# Altium PCB Micromouse_PCB.PcbDoc (part 3 of 3)
Units mm, origin at the board's own origin, x right, y up, seen from the top; angles counter-clockwise.
Board outline 75.15 x 115 mm, 2 copper layers (Top Layer, Bottom Layer); 124 components, 112 nets, 418 pads, 146 vias.
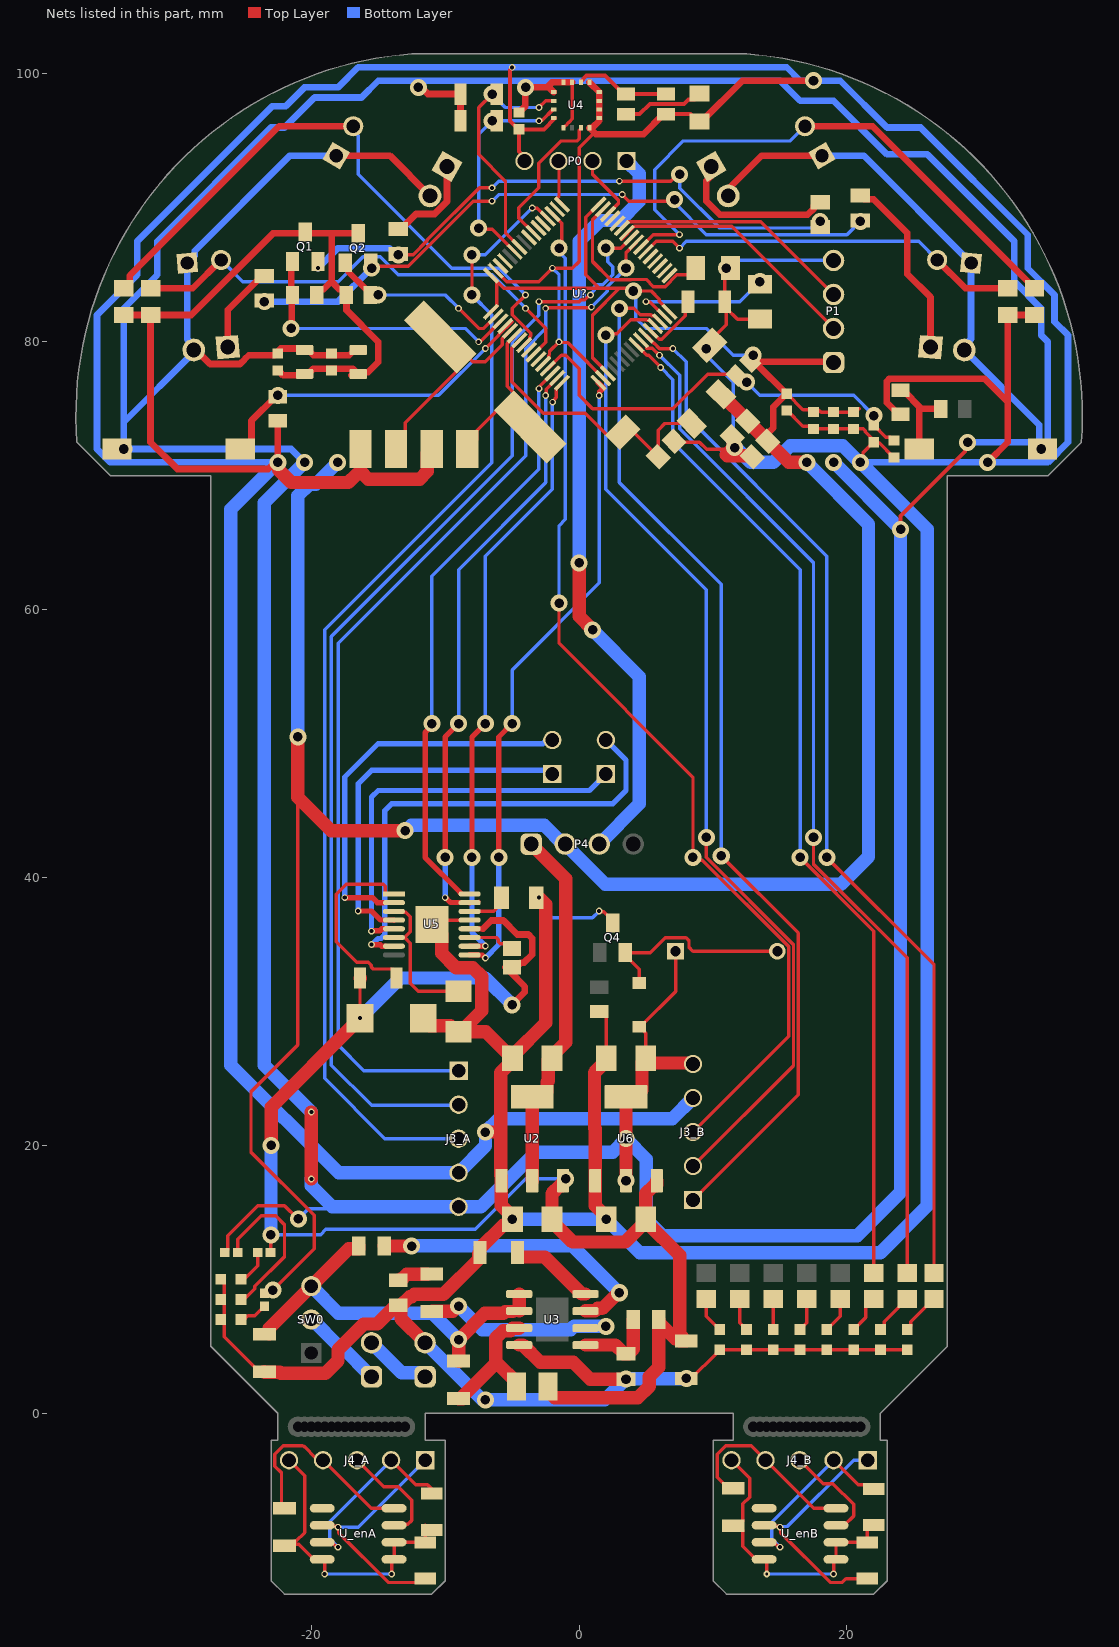
[diagram p2: the nets of this part, all layers, seen from the top]

## Via types
v1: diameter 1.27/1.27 (per signal layer), hole 0.711, Top Layer to Bottom Layer, 88 vias
v2: diameter 0.5, hole 0.3, Top Layer to Bottom Layer, 54 vias
v3: diameter 1.27, hole 0.711, Top Layer to Bottom Layer, 2 vias
v4: diameter 0.5, hole 0.2, Top Layer to Bottom Layer, 1 vias
v5: diameter 1, hole 0.3, Top Layer to Bottom Layer, 1 vias

## Nets (pads, with @x,y where several pads share a name; then routed paths per layer and width w, separated by ;. In a path a pad name is that pad's centre, name@x,y a point inside that pad or via, vN(x,y) a via of type N, cw(c..) or ccw(c..) an arc to the next point about the centre after c; other vN are vias at no path point) (continued)
DBL_6: DBL_6.2 U?.25 | length 76.7
  Top Layer w0.254: U?.25@4.268,79.768 4.286,79.768 5.066,78.988 5.187,78.988 v2(6.087,78.087) ; v1(16.5,41.5) 22,36 DBL_6.2@22,10.475
  Bottom Layer w0.254: v2(6.087,78.087) 7,77.175 7,72.5 16.5,63 v1(16.5,41.5)
DBL_7: DBL_7.2 U?.26 | length 77.4
  Top Layer w0.254: U?.26@5.027,79.527 5.473,79.527 v2(6,79) ; v1(17.5,43) 17.5,41.001 24.5,34.001 DBL_7.2@24.5,10.475
  Bottom Layer w0.254: v2(6,79) 7.5,77.5 7.5,73.5 17.5,63.5 v1(17.5,43)
DBL_8: DBL_8.2 U?.27 | length 79.5
  Top Layer w0.254: U?.27@4.975,80.475 4.993,80.475 5.587,79.881 5.619,79.881 6.001,79.5 v2(7,79.5) ; v1(18.5,41.5) 26.5,33.5 DBL_8.2@26.5,10.475
  Bottom Layer w0.254: v2(7,79.5) 8,78.5 8,74.5 18.5,64 v1(18.5,41.5)
DEBUG: R_BT.2 SW_BT1.1 U?.4 | length 25.1
  Top Layer w0.254: v2(-7,79.5) -5.996,80.504 -5.996,80.516 U?.4@-4.995,81.518
  Top Layer w0.5: SW_BT1.1@-25.31,72 -25.01,72 -24.46,72.55 -24.46,74.115 -22.675,75.9 R_BT.2@-22.5,75.9
  Bottom Layer w0.254: v1(-22.5,76) -10.5,76 v2(-7,79.5)
F_EM: Q2.1 R_IR2.2 U?.2 | length 13.4
  Top Layer w0.254: v2(-9,82.5) -7.5,81 -7.115,81 U?.2@-6.226,81.889
  Top Layer w0.5: Q2.1@-17.45,85.9 -17.2,85.65 -17.2,85.2 -15.925,83.925 -15.85,83.925 -15.6,83.675 R_IR2.2@-15.6,83.5
  Bottom Layer w0.254: v1(-15,83.5) -10,83.5 v2(-9,82.5)
GND: C1.2 C2.2 C3.1 C4.2 C5.2 C6.2 C7.2 C8.2 C9.2 C10.2 C11.1 C12.2 C13.2 C16.2 C17.2 C18.2 C19.1 C21.2 C22.2 C23.2 C24.2 C27.1 C_GYRO_1.2 C_GYRO_2.2 C_IR1.2 C_IR2.1 C_IR3.1 C_IR4.2 D1.1 D3.1 D5.1 D6.1 D7.1 D8.1 D9.1 D10.1 D11.1 D12.1 D13.1 J3_A.04 J3_B.04 P0.04 P1.4 P2.2 Q1.3 Q2.3 Q4.3 R5.1 R7.1 R9.2 R12.2 R_BT0_2.1 R_BT.1 R_BUZZ.1 R_GYRO_1.2 R_IR1.1 R_IR2.1 R_IR7.1 R_IR8.1 R_IR9.1 R_IR10.1 SW1_RST.2 U2.1 U3.4 U4.4 U4.8 U4.9 U4.10 U4.11 U4.12 U4.13 U5.13 U5.17 U6.1 U?.12 U?.18 U?.63 | length 702.5
  Top Layer w0.254: D3.1@-26.5,10 -26.5,5.725 -23.875,3.1 C12.2@-23.5,3.1 ; U5.17@-11,36.5 -10.675,36.825 U5.13@-8.175,36.825 ; U?.63@-6.226,85.311 -5.414,84.5 -3,84.5 v2(-2,85.5) -0.5,85.5 0,86 0,94.5 1.125,95.625 ; U?.12@-2.69,78.354 -2.269,78.774 -2.269,78.962 -2.212,79.019 -2.212,79.288 v2(-1.5,80) -1.455,79.955 -0.869,79.955 U?.18@2.214,76.872 ; R_BUZZ.1@1.5,30 1.651,30 2.024,29.627 C24.2@2.024,26.5 ; v2(1.5,37.5) 1.547,37.453 1.847,37.453 2.5,36.8 Q4.3@2.5,36.6 ; C3.1@7.084,72.584 7.155,72.513 8.987,72.513 9.516,71.984 11.484,71.984 v3(11.61,72.11) ; v1(8,2.6) 8.375,2.6 10.227,4.452 10.227,4.477 D5.1@10.5,4.75 D6.1@12.5,4.75 D7.1@14.5,4.75 D8.1@16.5,4.75 D9.1@18.5,4.75 D10.1@20.5,4.75 D11.1@22.5,4.75 D12.1@24.5,4.75 ; SW1_RST.2@9.749,80.022 11,81.273 R9.2@11,82.524 ; C27.1@11.3,85.5 10.876,85.076 R9.2@10.876,83 10.876,82.648 R9.2@11,82.524 ; C11.1@13.5,81.7 11.824,81.7 R9.2@11,82.524 ; C6.2@15.5,74.873 15.527,74.873 16.713,73.687 17.313,73.687 C7.2@17.5,73.5 C8.2@19,73.5 C9.2@20.5,73.5 21.218,73.5 21.367,73.351 21.367,73.281 22.195,72.453 22.393,72.453 23.473,71.373 C10.2@23.5,71.373 ; v1(21,71) 21.194,71.194 21.194,71.721 21.973,72.5 C22.2@22,72.5
  Top Layer w0.3: v2(-5,100.5) -5,100.446 -5.156,100.29 -5.156,96.502 -4.527,95.873 C_GYRO_1.2@-4.5,95.873 ; P0.04@-4.08,93.5 -4.08,93.79 -4.5,94.21 C_GYRO_1.2@-4.5,95.873 ; U4.4@-1.8,96.7 -2.627,95.873 C_GYRO_1.2@-4.5,95.873 ; C_GYRO_2.2@6.5,97 8.3,97 8.85,96.45 R_GYRO_1.2@9,96.45
  Top Layer w0.5: R_IR10.1@-34,82 R_IR9.1@-32,82 ; R_BT.1@-22.5,74.1 v1(-22.5,71) -22.708,71 -23.208,70.5 -30,70.5 -32,72.5 R_IR9.1@-32,82 ; C_IR2.1@-22.5,77.873 -22.371,77.744 -22.344,77.744 -22.1,77.5 C_IR1.2@-20.5,77.5 ; C_IR1.2@-20.5,77.61 -20.23,77.61 -19.84,78 -16.9,78 C_IR3.1@-16.7,77.8 ; R_IR1.1@-19.732,83.543 -19.35,83.925 -19.075,83.925 -18.475,84.525 -18.475,88.075 -18.5,88.1 ; -18.5,84.5 -17.925,83.925 -17.65,83.925 -17.4,83.675 R_IR2.1@-17.4,83.5 -17.368,83.468 -17.368,82.368 -15,80 -15,78.5 -15.77,77.73 -16.37,77.73 C_IR3.1@-16.5,77.6 C_IR3.1@-16.7,77.8 ; C_IR3.1@-17,77.5 C_IR3.1@-16.7,77.8 ; Q2.3@-16.5,88.1 -18.5,88.1 ; U4.8@0.775,95.975 0.875,95.875 1.25,95.5 4.8,95.5 6.3,97 C_GYRO_2.2@6.5,97 ; U4.13@0.775,99.375 U4.12@1.5,98.65 U4.11@1.5,98 U4.10@1.5,97.35 U4.9@1.5,96.7 1.5,96.5 1,96 ; R_GYRO_1.2@9,96.45 9.15,96.45 12.2,99.5 v1(17.5,99.5) ; v1(21,71) v1@21.208,71 ; R_BT0_2.1@24,74.6 23.825,74.6 22.975,75.45 22.975,77.045 23.18,77.25 30.25,77.25 32,75.5 ; v1(30.5,71) 32,72.5 32,75.5 ; R_IR8.1@33.846,82 R_IR7.1@32,82 32,75.5 ; R_IR9.1@-32,82 -28.963,82 -22.862,88.1 -20.5,88.1 -18.5,88.1
  Top Layer w1: C12.2@-23.5,3.1 -23.475,3.075 -22.366,3.075 -22.287,2.996 -18.938,2.996 -18,3.934 -18,4.75 -16.08,6.67 -15.08,6.67 -13.704,8.046 -13.503,8.046 R5.1@-13.5,8.049 ; v1(-22.5,71) -22.448,70.948 -22.448,70.448 -21.5,69.5 -17.237,69.5 -16.652,70.086 ; C1.2@-16.325,72 -16.325,70.325 -15.739,69.739 -11.912,69.739 -11.326,70.325 -11.326,71.674 C2.2@-11,72 C2.2@-11,71.424 ; C19.1@-11.64,29.5 -11.64,29.474 C19.1@-11.145,28.979 ; P2.2@-11.5,5.27 -13.296,7.066 -13.296,8.046 -13.299,8.049 -12.655,8.694 -12.484,8.694 -12.298,8.879 -10.13,8.879 -7.5,11.509 -7.5,11.9 C13.2@-7.4,12 ; C19.1@-11.145,28.935 R12.2@-9.61,28.935 ; U5.17@-11,36.5 -10.27,35.77 -10.27,34.347 -9.194,33.271 -7.93,33.271 -7.271,32.612 -7.271,30.054 R12.2@-8.825,28.5 ; R12.2@-9,28.5 R12.2@-8.825,28.5 ; C13.2@-7.4,12.325 -5.678,14.047 -5.253,14.047 -4.976,14.324 v1(-4.976,14.5) -4.976,14.676 -5.8,15.5 U2.1@-5.8,17.375 -5.8,17.7 -5.854,17.754 -5.854,21 ; v1(-7,21) -5.854,21 ; U3.4@-4.475,5.095 -4.19,5.095 -2.902,3.807 -0.43,3.807 0.828,2.549 v1(3.5,2.549) ; C21.2@-3.2,38.5 v2(-3,38.5) -2.496,37.996 -2.496,29.156 C18.2@-4.976,26.676 ; v1(2.024,14.5) 2.024,14.676 1.2,15.5 U6.1@1.2,17.375 1.2,21.239 1.146,21.293 1.146,25.446 1.747,26.047 1.747,26.223 C24.2@2.024,26.5 ; 10.987,71.56 11.536,72.11 v3(11.61,72.11) ; 11.06,71.487 12.845,71.487 C5.2@12.916,71.416 ; C4.2@11.416,72.916 11.487,72.845 11.487,72.305 11.558,72.234 11.558,72.183 C4.2@11.485,72.11 ; R12.2@-8.825,28.5 -6.976,28.5 -5.429,26.953 -5.253,26.953 C18.2@-4.976,26.676 ; -5.854,21 -5.854,25.446 -4.976,26.324 C18.2@-4.976,26.5 C18.2@-4.976,26.676
  Bottom Layer w0.254: v2(-3,38.5) -2.476,37.976 -2.476,37.476 -2,37 1,37 v2(1.5,37.5) ; v2(-2,85.5) -1.5,85 v2(-1.5,80) ; v1(9.5,79.5) 9.694,79.306 9.694,78.806 11.5,77 11.5,72.219 v3(11.61,72.11) ; v1(11,85.5) 11.275,85.5 11.855,86.08 P1.4@19,86.08
  Bottom Layer w0.5: v1(-22.5,71) -35,71 -36,72 -36,82 -33,85 -33,87.5 -22.9,97.6 -21.9,97.6 -20.5,99 -18,99 -16.5,100.5 v2(-5,100.5) 15.5,100.5 16.5,99.5 v1(17.5,99.5) 19.5,99.5 23,96 25.5,96 33.5,88 33.5,85.5 35.5,83.5 35.5,81.5 36.5,80.5 36.5,72.5 35,71 v1(30.5,71) v1(21,71)
  Bottom Layer w1: v1(-22.5,71) -26,67.5 -26,26 -17.96,17.96 J3_A.04@-9,17.96 -6.99,19.97 -6.99,20.93 v1@-6.96,20.96 ; P2.2@-11.5,5.27 -7.282,1.052 -7.052,1.052 v1(-7,1) 1.926,1 3.476,2.549 v1(3.5,2.549) 3.525,2.575 7.975,2.575 v1(8,2.6) ; v1(-7,21) -6,22 6.96,22 J3_B.04@8.5,23.54 ; v1(-4.976,14.5) v1(2.024,14.5) 4.524,12 22.5,12 26,15.5 26,66 v1(21,71) 20.927,71 19.692,72.235 15.75,72.235 14.515,71 12.792,71 11.683,72.11 v3(11.61,72.11)
GND_inA: C_enA.2 J4_A.04 U_enA.4 | length 15.5
  Top Layer w0.254: C_enA.2@-22.223,-7.277 -22.223,-4.445 -22.726,-3.942 -22.726,-3.058 -22.102,-2.434 -20.704,-2.434 cw(c-20.704,-2.688) -20.685,-2.435 cw(c-20.715,-2.814) -20.5,-2.5 -19.686,-3.314 -19.306,-3.314 -15.525,-7.095 U_enA.4@-13.818,-7.095
GND_inB: C_enB.2 J4_B.04 U_enB.4 | length 14.3
  Top Layer w0.254: C_enB.2@11.5,-5.6 11.125,-5.6 10.314,-4.789 10.314,-3.058 10.938,-2.434 12.854,-2.434 J4_B.04@13.92,-3.5 17.515,-7.095 U_enB.4@19.182,-7.095
IN1: U5.16 U?.14 | length 44.5
  Top Layer w0.254: U5.16@-8.875,38.875 -8.875,38.873 -8.778,38.775 U5.16@-8.175,38.775 ; v2(-3,76.5) -2.953,76.547 -2.953,76.677 U?.14@-1.983,77.646
  Top Layer w0.4: v1(-11,51.5) -11,51.331 -11.5,50.831 -11.5,41.5 U5.16@-8.875,38.875
  Bottom Layer w0.254: v1(-11,51.5) -11,62.5 -3,70.5 v2(-3,76.5)
IN2: U5.15 U?.15 | length 44.7
  Top Layer w0.254: U5.15@-8.175,38.125 -7.572,38.125 -7.474,38.223 U5.15@-7.474,38.248 ; v2(-2.5,76) -2.453,76.047 -2.453,76.469 U?.15@-1.63,77.293
  Top Layer w0.4: v2(-10,38.5) -9.973,38.5 -9.658,38.185 -9.646,38.185 -9.595,38.135 -8.184,38.135 U5.15@-8.175,38.125 ; v1@-10,41.828 -10,50.5 v1(-9,51.5)
  Bottom Layer w0.254: v1(-9,51.5) -9,63 -2.5,69.5 v2(-2.5,76)
  Bottom Layer w0.4: v2(-10,38.5) v1(-10,41.5)
IN3: U5.10 U?.16 | length 46.1
  Top Layer w0.254: v2(-1.977,75.5) -1.977,75.567 -1.697,75.847 -1.697,76.519 U?.16@-1.5,76.715
  Top Layer w0.4: U5.10@-8.175,34.881 -7.013,34.881 v2(-7,34.894) ; v1(-8,41.5) -8,50.5 v1(-7,51.5)
  Bottom Layer w0.254: v1(-7,51.5) -7,64 -2,69 -2,75.477 v2(-1.977,75.5)
  Bottom Layer w0.4: v1(-8,41.5) -8,35.894 v2(-7,34.894)
IN4: U5.9 U?.17 | length 48
  Top Layer w0.4: U5.9@-8.175,34.225 -7.557,34.225 -7.547,34.215 -7.242,34.215 -7.027,34 v2(-7,34) ; v1(-6,41.5) -6,50.5 v1(-5,51.5) ; U?.17@1.439,76.939 1.775,76.603 1.775,76.519 1.519,76.263 1.519,76.019 v2(1.5,76)
  Bottom Layer w0.254: v1(-5,51.5) -5,55.5 1.5,62 v2(1.5,76)
  Bottom Layer w0.4: v2(-7,34) -6,35 v1(-6,41.5)
"IRP MPU": U4.7 U?.55 | length 10.9
  Top Layer w0.254: U?.55@-3.397,88.14 -4.5,89.243 -4.5,90 -3,91.5 -3,93.33 -1.33,95 -0.149,95 0,95.149 0,95.8 0.125,95.925 U4.7@0.125,95.975
L_RV: DS6.2 R_IR10.2 U?.8 | length 47.4
  Top Layer w0.254: U?.8@-4.104,79.768 -3.684,80.188 -3.684,80.377 -3.627,80.434 -3.627,80.651 -5,82.024 -5,82.5 v2(-4,83.5)
  Top Layer w0.5: R_IR10.2@-34,84 -33.907,84 -33.557,84.35 -33.557,84.943 -22.4,96.1 DS6.2@-16.865,96.1
  Bottom Layer w0.254: DS6.2@-16.865,96.1 -16.865,95.763 -16.5,95.398 -16.5,92.5 -9.5,85.5 -6,85.5 v2(-4,83.5)
LF_RV: DS7.2 R_IR9.2 U?.10 | length 36.3
  Top Layer w0.254: v2(-4,82.5) -2.5,81 -2.5,79.958 U?.10@-3.397,79.061
  Top Layer w0.5: R_IR9.2@-32,84 -28.846,84 DS7.2@-26.735,86.111
  Bottom Layer w0.254: DS7.2@-26.735,86.111 -25.124,84.5 -18,84.5 -16.138,86.362 -14.862,86.362 -13.5,85 -6.5,85 v2(-4,82.5)
LR_EM: Q1.1 R_IR1.2 U?.3 | length 21.7
  Top Layer w0.254: v2(-7.5,80) -7.453,80.047 -7.361,80.047 U?.3@-5.872,81.536
  Top Layer w0.5: v1(-21.5,81) -21.45,81.05 -21.45,83.45 R_IR1.2@-21.4,83.5 -21.5,83.6 -21.5,85.85 Q1.1@-21.45,85.9
  Bottom Layer w0.254: v1(-21.5,81) -8.5,81 v2(-7.5,80)
NetC1_1: C1.1 U?.5 Y1.2 | length 17.9
  Top Layer w0.254: C1.1@-13.675,72 -12.975,72.699 -12.975,73.962 -9.121,77.816 Y1.2@-9.121,78.669 ; U?.5@-5.165,80.828 -5.165,80.81 -5.725,80.25 -5.725,79.775 -7,78.5 -7.929,78.5 -8.183,78.754 -9.036,78.754 Y1.2@-9.121,78.669 ; Y1.2@-9.121,78.669 Y1.2@-9.121,79.121 ; Y1.2@-9.121,79.121 Y1.2@-10.359,80.359 Y1.2@-9.121,79.121
NetC2_1: C2.1 U?.6 Y1.1 | length 14.4
  Top Layer w0.254: C2.1@-8.35,72 -7.65,72.699 -7.65,73.35 -6.153,74.847 -5.783,74.847 -4.577,73.641 Y1.1@-3.641,73.641 -3.641,74.947 -5.371,76.677 -5.371,79.878 -4.893,80.356 U?.6@-4.893,80.375
NetC3_2: C3.2 R2.2 SW1_RST.1 U?.7 | length 21.4
  Top Layer w0.254: U?.7@-4.54,80.021 -4.54,80.003 -5.017,79.525 -5.017,77.017 -2.674,74.674 0.451,74.674 2.087,73.039 3.039,73.039 SW1_RST.1@3.251,73.251 4.081,73.251 C3.2@5.916,71.416 5.845,71.487 5.845,72.195 5.916,72.266 5.916,72.544 5.898,72.561 5.898,72.749 5.916,72.767 5.916,73.416 6.404,73.904 R2.2@8.404,73.904
NetC11_2: C11.2 U?.31 | length 11
  Top Layer w0.254: v2(5,83) 5.047,82.953 5.325,82.953 U?.31@6.389,81.889
  Bottom Layer w0.254: v2(5,83) 12,83 v1(13.5,84.5)
NetC13_1: C13.1 U3.8 | length 6.5
  Top Layer w1: C13.1@-4.6,12 -4.6,11.695 -4.575,11.67 -2.575,11.67 0.19,8.905 U3.8@0.475,8.905
NetC14_1: C14.1 U3.6 | length 14
  Top Layer w1: C14.1@-11,7.6 -10.975,7.625 -9.448,7.625 -9.073,8 v1(-9,8)
  Bottom Layer w1: v1(-9,8) -7.246,6.246 -0.635,6.246 -0.382,6.498 v1(2,6.498)
NetC14_2: C14.2 R5.2 | length 2.3
  Top Layer w1: R5.2@-13.5,9.951 -13.497,9.954 -13.296,9.954 -12.875,10.375 C14.2@-11.35,10.375
NetC15_2: C15.2 L3.1 U3.3 | length 10.4
  Top Layer w1: C15.2@-9,1.1 -8.675,1.1 -8.65,1.125 -8.65,1.314 -6.214,3.75 ; L3.1@-4.676,2 -4.676,2.326 -6.1,3.75 -6.214,3.75 ; U3.3@-4.475,6.365 -4.491,6.349 -4.96,6.349 -5.144,6.165 -5.668,6.165 -6.214,5.619 -6.214,3.75
NetC20_2: C20.2 U5.11 | length 3.3
  Top Layer w0.254: U5.11@-8.175,35.525 -6.197,35.525 -6.048,35.376 -6.048,35.205 -5.899,35.057 -5.548,35.057 -5.5,35.009 C20.2@-5.5,34.7
NetC21_1: C21.1 U5.14 | length 3.1
  Top Layer w0.254: U5.14@-8.175,37.475 -6.372,37.475 -6.223,37.624 -6.223,38.419 C21.1@-6,38.642
NetC27_2: C27.2 U?.47 | length 13.3
  Top Layer w0.254: U?.47@1.793,89.908 1,89.115 1,86 2.362,84.638 3.857,84.638 3.878,84.659 5.016,84.659 5.548,84.127 6.43,84.127 7.304,85 8.2,85 C27.2@8.7,85.5
NetC_GYRO_2_1: C_GYRO_2.1 C_GYRO_3.2 U4.14 | length 7.2
  Top Layer w0.3: U4.14@0.125,99.375 0.125,99.432 0.568,99.875 1.925,99.875 3.3,98.5 C_GYRO_3.2@3.5,98.5 C_GYRO_2.1@6.5,98.5
NetC_GYRO_3_1: C_GYRO_3.1 R_GYRO_1.1 | length 6.1
  Top Layer w0.3: C_GYRO_3.1@3.5,97 4.5,97 5.275,97.775 7.824,97.775 8.149,98.1 8.613,98.1 R_GYRO_1.1@9.013,98.5
NetD1_2: D1.2 R3.2 | length 1.9
  Top Layer w0.254: D1.2@-25,7 -24.727,7.273 -24.206,7.273 -23.5,7.979 R3.2@-23.5,8
NetD3_2: D3.2 R10.2 | length 2.4
  Top Layer w0.254: D3.2@-25,10 -24,11 R10.2@-24,12
NetD4_2: D4.2 LS1.2 Q4.2 | length 15.2
  Top Layer w0.254: D4.2@4.5,32.135 4.5,33.15 3.45,34.2 Q4.2@3.45,34.4 5.311,34.4 6.417,35.506 7.983,35.506 8.206,35.283 8.206,34.794 8.5,34.5 LS1.2@14.8,34.5
NetD5_2: D5.2 DBL_1.1 | length 2.7
  Top Layer w0.254: DBL_1.1@9.5,8.525 9.5,7.25 D5.2@10.5,6.25
NetD6_2: D6.2 DBL_2.1 | length 2.5
  Top Layer w0.254: DBL_2.1@12,8.525 12,6.75 D6.2@12.5,6.25
NetD7_2: D7.2 DBL_3.1 | length 2.3
  Top Layer w0.254: D7.2@14.5,6.25 DBL_3.1@14.5,8.525
NetD8_2: D8.2 DBL_4.1 | length 2.5
  Top Layer w0.254: D8.2@16.5,6.25 17,6.75 DBL_4.1@17,8.525
NetD9_2: D9.2 DBL_5.1 | length 2.7
  Top Layer w0.254: D9.2@18.5,6.25 19.5,7.25 DBL_5.1@19.5,8.525
NetD10_2: D10.2 DBL_6.1 | length 2.9
  Top Layer w0.254: D10.2@20.5,6.25 21.402,7.152 21.402,7.977 21.95,8.525 DBL_6.1@22,8.525
NetD11_2: D11.2 DBL_7.1 | length 3.1
  Top Layer w0.254: D11.2@22.5,6.25 22.773,6.523 22.773,6.848 24.45,8.525 DBL_7.1@24.5,8.525
NetD12_2: D12.2 DBL_8.1 | length 3.1
  Top Layer w0.254: D12.2@24.5,6.25 24.773,6.523 24.773,6.848 26.45,8.525 DBL_8.1@26.5,8.525
NetD13_2: D13.2 R13.2 | length 12.3
  Top Layer w0.254: R13.2@-25.5,12 -25.5,13 -23.751,14.749 -22.657,14.749 -22,14.092 -22,11.69 -24.217,9.473 -24.217,9.283 D13.2@-25,8.5
NetDS1_1: DS1.1 R_IR3.2 | length 6.6
  Top Layer w0.5: DS1.1@-26.235,79.611 -26.235,82.39 -23.7,84.925 R_IR3.2@-23.5,84.925
NetDS2_1: DS2.1 R_IR4.2 | length 7.1
  Top Layer w0.5: R_IR4.2@-13.5,88.425 -13.3,88.425 -12.173,89.552 -10.787,89.552 -9.865,90.473 DS2.1@-9.865,93.1
NetDS3_1: DS3.1 R_IR6.2 | length 12.2
  Top Layer w0.5: DS3.1@9.865,93.1 9.865,92.396 9.5,92.031 9.5,90.5 10.5,89.5 17.075,89.5 17.525,89.95 17.525,90.15 17.8,90.425 R_IR6.2@18,90.425
NetDS4_1: DS4.1 R_IR5.2 | length 14
  Top Layer w0.5: R_IR5.2@20.943,91 21.293,90.65 21.975,90.65 24.5,88.125 24.5,85.071 26.235,83.336 DS4.1@26.235,79.611
NetLabel24: U?.45
NetLabel27: U?.50
NetLabel44: U?.54
NetLabel48: U?.53
NetLabel80: U?.56
NetLabel85: U?.37
NetLabel86: U?.44
NetLabel90: U?.61
NetLabel91: U?.62
NetLabel92: U?.33
NetLabel93: U?.34
NetLabel94: U?.35
NetLabel95: U?.36
NetLabel96: U?.9
NetLabel97: U?.11
NetP2_1: P2.1 P3.2 | length 5.1
  Bottom Layer w1: P3.2@-15.5,5.27 -13.26,3.03 -11.8,3.03 P2.1@-11.5,2.73
NetP3_1: P3.1 SW0.2 | length 6.3
  Bottom Layer w1: SW0.2@-20,7 -19.934,7 -17.901,4.967 -17.737,4.967 P3.1@-15.5,2.73
NetQ1_2: Q1.2 R_IR4.1 R_IR6.1 | length 43.3
  Top Layer w0.254: v1(-13.5,86.5) -12.394,86.5 -11.326,87.568 -11.326,87.613 -7.439,91.5 v2(-6.5,91.5) ; v2(3,92) 6.843,92 7.343,92.5 v1(7.5,92.5)
  Bottom Layer w0.254: v2(-6.5,91.5) -6,92 v2(3,92) ; v1(7.5,92.5) 7.516,92.484 7.516,91.484 10.5,88.5 17.343,88.5 17.843,89 v1(18,89)
  Bottom Layer w0.5: v2(-19.5,85.5) -18,87 -14.178,87 -13.678,86.5 v1(-13.5,86.5)
NetQ2_2: Q2.2 R_IR3.1 R_IR5.1 | length 49.7
  Top Layer w0.254: v1(-15.5,85.5) -15.362,85.638 -12.755,85.638 -7.893,90.5 v2(-6.5,90.5) ; v2(3.22,91) 3.72,90.5 3.793,90.5 7.008,90.5 v1(7.129,90.621)
  Bottom Layer w0.254: v2(-6.5,90.5) -6,91 v2(3.22,91) ; v1(7.129,90.621) 7.129,90.371 9.5,88 20,88 v1(21,89)
  Bottom Layer w0.5: v1(-23.5,83) -18,83 v1(-15.5,85.5)
NetR6_2: R6.2 U3.7 | length 22.1
  Top Layer w1: R6.2@-14.549,12.5 -14.549,12.495 -14.546,12.492 -12.508,12.492 v3(-12.5,12.484) ; U3.7@0.475,7.635 0.491,7.651 1.189,7.651 1.389,7.851 1.684,7.851 1.721,7.887 1.814,7.887 2.927,9 v1(3,9)
  Bottom Layer w1: v3(-12.5,12.484) -12.484,12.5 -0.5,12.5 v1(3,9)
NetR7_2: R7.2 R8.2 U3.5 | length 6.2
  Top Layer w1: U3.5@0.475,5.095 2.71,5.095 3.296,4.509 3.296,4.454 3.704,4.454 4.049,4.799 R8.2@4.049,7
NetR11_2: R11.2 U5.1 | length 14.7
  Top Layer w0.254: U5.1@-13.825,38.775 -14.421,38.775 -14.484,38.838 -14.484,39.351 -14.633,39.5 -17.392,39.5 -18.131,38.761 -18.131,35.199 -16.613,33.681 -15.742,33.681 -15.519,33.458 -15.519,33.322 -15.37,33.173 -13.973,33.173 -13.65,32.85 R11.2@-13.65,32.5
NetR12_1: R12.1 U5.3 U5.6 | length 11.2
  Top Layer w0.254: U5.6@-13.825,35.525 -13.03,35.525 -12.611,35.106 -12.611,32.111 -12,31.5 R12.1@-9,31.5 ; U5.3@-13.825,37.475 -13.154,37.475 -13.075,37.396 -13.02,37.396 -12.951,37.396 -12.617,37.062 -12.617,35.938 -12.951,35.604
NetR_BT0_1_2: R_BT0_1.2 R_BT0_2.2 SW_BT0.1 | length 6.7
  Top Layer w0.5: R_BT0_2.2@24,76.4 24.175,76.4 25.575,75 R_BT0_1.2@27,75 ; SW_BT0.1@25.405,72 25.405,75.17
OUT1: J1.01 U5.4 | length 27.5
  Top Layer w0.4: v2(-16.5,37.5) -15.5,37.5 -14.831,36.831 -13.831,36.831 U5.4@-13.825,36.825
  Bottom Layer w0.4: v2@-16.5,37.504 -16.5,47 -15.5,48 -2.27,48 J1.01@-2,47.73
OUT2: J1.02 U5.2 | length 29.5
  Top Layer w0.254: U5.2@-14.625,38.125 U5.2@-13.825,38.125
  Top Layer w0.4: v2(-17.5,38.5) -15.444,38.5 -15.069,38.125 U5.2@-14.625,38.125
  Bottom Layer w0.4: v2(-17.5,38.5) -17.5,47.5 -15,50 -2.719,50 -2.635,50.084 -2.032,50.084 J1.02@-1.947,50
OUT3: J2.01 U5.5 | length 29.5
  Top Layer w0.4: v2(-15.5,36) -15.481,36.019 -14.88,36.019 -14.73,36.169 U5.5@-14.483,36.169
  Bottom Layer w0.4: v2(-15.5,36) -15.5,46 -15,46.5 0.77,46.5 J2.01@2.166,47.896
OUT4: J2.02 U5.7 | length 35.3
  Top Layer w0.254: U5.7@-14.472,34.881 -13.831,34.881 U5.7@-13.825,34.875
  Top Layer w0.4: v2(-15.5,35) -15.481,34.981 -14.83,34.981 -14.73,34.881 U5.7@-14.472,34.881
  Bottom Layer w0.4: v2(-15.5,35) -15.473,35 -15.021,35.451 -14.783,35.451 -14.5,35.734 -14.5,45 -14,45.5 2.5,45.5 3.5,46.5 3.5,48.77 J2.02@2,50.27
OUT_A: J4_A.03 U_enA.3 | length 8.3
  Top Layer w0.254: J4_A.03@-16.58,-3.5 -14.58,-5.5 -13.519,-5.5 -12.653,-6.347 -12.504,-6.496 -12.504,-8.004 -12.794,-8.294 -13.747,-8.294 U_enA.3@-13.818,-8.365
OUT_B: J4_B.03 U_enB.3 | length 7.9
  Top Layer w0.254: J4_B.03@16.46,-3.5 18.22,-5.26 18.949,-5.26 20.496,-6.807 20.496,-7.669 19.8,-8.365 U_enB.3@19.182,-8.365
OUT_enA: J3_A.03 U?.52 | length 86.6
  Top Layer w0.254: v1(-8,83.5) v1(-8,86.5) ; v2(-3.5,90) -3.49,89.99 -3.126,89.99 U?.52@-2.337,89.201
  Bottom Layer w0.254: J3_A.03@-9,20.5 -14.5,20.5 -19,25 -19,58.5 -6.523,70.977 -6.523,82.023 v1(-8,83.5) ; v1@-8.01,86.5 -7,86.5 v2(-3.5,90)
OUT_enB: J3_B.03 U?.51 | length 79.7
  Top Layer w0.254: U?.51@-1.983,89.554 -1.983,89.536 -1.306,88.858 -1.306,87.194 v1(-1.5,87) ; v1(-1.5,60.5) -1.5,57.5 8.5,47.5 v1(8.5,41.5) 8.694,41.306 9.199,41.306 15.652,34.853 15.652,28.152 J3_B.03@8.5,21
  Bottom Layer w0.254: v1(-1.5,60.5) -1.5,66.281 -1.023,66.758 -1.023,86.248 -1.5,86.725 v1(-1.5,87)
PB2: R9.1 U?.28 | length 4.6
  Top Layer w0.254: U?.28@5.328,80.828 5.97,80.187 6.18,80.187 7.932,81.939 7.932,82.808 R9.1@8.062,82.938
PushA: U_enA.5
PushB: U_enB.5
R_RV: DS8.2 R_IR8.2 U?.39 | length 43.6
  Top Layer w0.254: U?.39@4.621,87.079 5.542,88 v2(7.5,88)
  Top Layer w0.5: DS8.2@16.865,96.1 21.9,96.1 R_IR8.2@34,84
  Bottom Layer w0.254: v2(7.5,88) 5.647,89.853 5.647,92.866 7.781,95 15.765,95 DS8.2@16.865,96.1
RF_RV: DS5.2 R_IR7.2 U?.38 | length 29.2
  Top Layer w0.254: U?.38@4.975,86.726 5.749,87.5 7,87.5 v2(7.5,87)
  Top Layer w0.5: DS5.2@26.735,86.111 28.846,84 R_IR7.2@32,84
  Bottom Layer w0.254: v2(7.5,87) 8,87.5 25.346,87.5 DS5.2@26.735,86.111
RX: P1.3 U?.43 | length 17.7
  Top Layer w0.254: U?.43@3.628,88.972 13.568,88.972 19.053,83.487 P1.3@19.053,83.447
SCL: R15.1 U4.2 U?.58 | length 18.3
  Top Layer w0.254: v1(-6.5,98.5) -7.5,97.5 -7.5,94 -5.5,92 -5.5,88.14 -4.458,87.098 U?.58@-4.458,87.079 ; v2(-3,97.5) -2.5,98 U4.2@-1.9,98
  Bottom Layer w0.254: v1(-6.5,98.5) -5.5,97.5 v2(-3,97.5)
SCL_A: J4_A.02 R18.1 U_enA.7 | length 13.9
  Top Layer w0.254: U_enA.7@-19.182,-9.635 -18.463,-9.635 -18.145,-9.953 -18.047,-9.953 v2(-18,-10) ; J4_A.02@-14.04,-3.5 -12.213,-5.327 -11.323,-5.327 R18.1@-11,-5.65
  Bottom Layer w0.254: v2(-18,-10) -18.631,-9.369 -18.631,-8.091 J4_A.02@-14.04,-3.5
SCL_B: J4_B.02 R16.1 U_enB.7 | length 13.9
  Top Layer w0.254: U_enB.7@13.818,-9.635 14.537,-9.635 14.855,-9.953 14.953,-9.953 v2(15,-10) ; J4_B.02@19,-3.5 20.827,-5.327 21.677,-5.327 R16.1@22,-5.65
  Bottom Layer w0.254: v2(15,-10) 14.369,-9.369 14.369,-8.131 J4_B.02@19,-3.5
SCL_enA: J3_A.02 U?.41 | length 85.2
  Top Layer w0.254: v2(-3,83) 0,83 0.139,83.139 0.422,83.139 0.783,83.5 v2(0.85,83.5) ; v1(2,87) 3.109,87 3.896,87.786 U?.41@3.914,87.786
  Bottom Layer w0.254: J3_A.02@-9,23.04 -9.04,23 -15.5,23 -18.5,26 -18.5,58 -5,71.5 -5,80 -3,82 v2(-3,83) ; v2(0.85,83.5) 0.85,83.567 1.125,83.841 1.125,84.125 1.274,84.274 1.774,84.274 2.5,85 2.5,85.613 2.129,85.984 2.129,86.871 v1(2,87)
SCL_enB: J3_B.02 U?.29 | length 75.3
  Top Layer w0.254: v1(2,80.5) 2.115,80.615 2.814,80.615 3.858,81.66 5.016,81.66 5.073,81.603 5.261,81.603 U?.29@5.682,81.182 ; J3_B.02@8.5,18.46 16.006,25.966 16.006,35 9.5,41.506 v1(9.5,43)
  Bottom Layer w0.254: v1(2,80.5) 2,69 9.5,61.5 v1(9.5,43)
SDA: R14.1 U4.3 U?.59 | length 16.8
  Top Layer w0.254: v1(-7.5,88.5) -7.398,88.398 -6.484,88.398 U?.59@-4.811,86.726 ; v2(-3,96.5) -2.953,96.547 -2.753,96.547 -1.95,97.35 U4.3@-1.9,97.35
  Bottom Layer w0.254: v1(-7.5,88.5) -7.5,95.5 v1(-6.5,96.5) v2(-3,96.5)
SDA_A: J4_A.01 R19.1 U_enA.6 | length 18.4
  Top Layer w0.254: U_enA.6@-19.182,-8.365 -19.111,-8.437 -18.13,-8.437 -18.067,-8.5 v2(-18,-8.5) -17.953,-8.547 -17.953,-8.939 -14.261,-12.631 -11.781,-12.631 R19.1@-11.5,-12.35
  Bottom Layer w0.254: v2(-18,-8.5) -16.5,-8.5 J4_A.01@-11.5,-3.5
SDA_B: J4_B.01 R17.1 U_enB.6 | length 18.4
  Top Layer w0.254: U_enB.6@13.818,-8.365 13.889,-8.437 14.87,-8.437 14.933,-8.5 v2(15,-8.5) 15.047,-8.547 15.047,-8.939 18.739,-12.631 19.642,-12.631 19.923,-12.35 R17.1@21.5,-12.35
  Bottom Layer w0.254: v2(15,-8.5) 15.047,-8.453 15.555,-8.453 20.508,-3.5 J4_B.01@21.54,-3.5
SDA_enA: J3_A.01 U?.40 | length 80.9
  Top Layer w0.254: v2(-2.5,82.5) -2.457,82.543 0.87,82.543 v2(0.913,82.587) ; v1(3.5,85.5) 3.5,86.647 4.268,87.414 U?.40@4.268,87.433
  Bottom Layer w0.254: J3_A.01@-9,25.58 -16.08,25.58 -18,27.5 -18,57.5 -4,71.5 -4,79.5 -2.5,81 v2(-2.5,82.5) ; v2(0.913,82.587) 2.102,83.776 2.102,84.102 v1(3.5,85.5)
SDA_enB: J3_B.01 U?.30 | length 78.8
  Top Layer w0.254: v1(3,82.5) 4.068,82.5 4.555,82.014 5.369,82.014 5.427,81.956 5.615,81.956 U?.30@6.036,81.536 ; J3_B.01@8.5,15.92 16.36,23.78 16.36,35.865 v1(10.612,41.612)
  Bottom Layer w0.254: v1(3,82.5) 3,69.5 10.612,61.888 v1(10.612,41.612)
SWCLK: P0.03 U?.49 | length 3.5
  Top Layer w0.254: P0.03@-1.54,93.5 -1.5,93.46 -1.5,90.887 -1.692,90.695 -1.692,90.677 U?.49@-1.276,90.261
SWDIO: P0.02 U?.46 | length 5.1
  Top Layer w0.254: P0.02@1,93.5 1,92.5 2.941,90.559 2.941,90.349 U?.46@2.146,89.554
TX: P1.2 U?.42 | length 19.4
  Top Layer w0.254: U?.42@3.17,87.67 4.118,88.618 11.382,88.618 P1.2@19,81
V33: C24.1 C_GYRO_1.1 C_IR1.1 C_IR2.2 C_IR3.2 C_IR4.1 D4.1 DS1.2 DS2.2 DS3.2 DS4.2 DS5.1 DS6.1 DS7.1 DS8.1 J3_A.05 J3_B.05 LS1.1 R13.1 R14.2 R15.2 SW_BT0.2 SW_BT1.2 U4.1 U4.5 U4.15 U4.16 U6.2 U6.4 | length 444.7
  Top Layer w0.254: R13.1@-26.457,12 -26.448,12 -26.239,12.209 -26.239,13.261 -24,15.5 -22,15.5 -21.024,14.524 v1(-20.96,14.524) ; R14.2@-8.85,96.15 R14.2@-8.85,96.5 ; U4.5@-1.175,95.975 -1.175,96.025 -1.152,96.048 -1.102,96.048 -0.902,96.248 -0.902,96.269 -0.769,96.402 -0.748,96.402 -0.5,96.65 -0.5,99.18 -0.502,99.182 U4.15@-0.502,99.375 ; D4.1@4.5,28.865 D4.1@4.57,28.865 ; C24.1@4.976,26.5 4.976,28.389 4.883,28.482 4.883,28.552 D4.1@4.57,28.865 ; LS1.1@7.2,34.5 7.2,31.495 D4.1@4.57,28.865
  Top Layer w0.3: v1(24,66) 24,67 28.814,71.814 28.814,72.314 v1(29,72.5)
  Top Layer w0.5: DS1.2@-28.765,79.389 -28.601,79.389 -27.552,78.34 -25.317,78.34 -24.964,78.693 -24.964,78.707 -24.671,79 -22.77,79 -22.27,79.5 C_IR1.1@-20.5,79.5 ; C_IR1.1@-20.5,79.4 -20.23,79.4 -19.83,79 -17.16,79 -16.9,79.26 -16.63,79.26 C_IR3.2@-16.5,79.39 ; DS6.1@-18.135,93.9 -14.135,93.9 DS2.2@-11.135,90.9 ; v1(-12,99) -11.792,99 -11.292,98.5 R15.2@-8.85,98.5 R14.2@-8.85,96.5 ; C_GYRO_1.1@-4.5,97.127 -4.473,97.127 -4.344,97.256 -4.344,97.283 -4.012,97.615 -4.012,98.988 v1(-4,99) -2.395,99 ; U4.1@-1.9,98.65 -2.25,99 -2.395,99 ; U4.15@-0.525,99.375 U4.16@-1.175,99.375 -2.02,99.375 -2.395,99 ; DS3.2@11.135,91.4 13.635,93.9 DS8.1@18.135,93.9
  Top Layer w1: v2(-20,17.5) v2(-20,22.5) ; v1(3.5,17.375) v1(3.5,20.5) U6.4@3.5,23.625 4.225,23.625 4.698,24.098 4.698,26.223 4.77,26.151 8.429,26.151 J3_B.05@8.5,26.08
  Bottom Layer w0.254: v1(-20.96,14.524) -20.205,15.279 -18.42,15.279 ; v1(3.5,17.375) 3.5,20.481 v1(3.5,20.5)
  Bottom Layer w0.5: v1(-20.5,71) -21.5,72 v1(-34,72) -34,74 ; DS6.1@-18.135,93.9 -21.6,93.9 -28.703,86.797 -28.703,86.452 DS7.1@-29.265,85.889 -29.265,80.214 -28.765,79.714 DS1.2@-28.765,79.389 -28.765,79.235 -34,74 ; DS8.1@18.135,93.9 21.254,93.9 DS5.1@29.265,85.889 29.265,80.214 28.765,79.714 DS4.2@28.765,79.389 34.353,73.802 34.353,72.147 v1(34.5,72) ; v1(29,72.5) 33.822,72.5 34.322,72 v1(34.5,72) ; -34,74 -34,82.5 -31.5,85 -31.5,87.5 -23,96 -22,96 -19.75,98.25 -16.25,98.25 -15,99.5 15,99.5 16.5,98 19,98 23,94 26,94 32.5,87.5 32.5,84.5 34.5,82.5 34.5,80.5 35,80 35,72.678 34.5,72.178 v1(34.5,72)
  Bottom Layer w1: v1(-20.5,71) -23.5,68 -23.5,26 v2(-20,22.5) ; v2(-20,17.5) -20,17 -18.42,15.42 J3_A.05@-9,15.42 -7.326,15.42 -3.246,19.5 2.5,19.5 v1(3.5,20.5) ; v1@3.5,20.481 5,18.981 5,14.5 6.246,13.254 20.754,13.254 24,16.5 v1(24,66) v1(19,71)
V_inA: C_enA.1 J4_A.05 R18.2 R19.2 U_enA.1 U_enA.2 U_enA.8 | length 23.6
  Top Layer w0.254: C_enA.1@-22.107,-10.248 -21.748,-10.248 C_enA.1@-21.4,-9.9 ; C_enA.1@-22,-9.9 C_enA.1@-21.4,-9.9 ; J4_A.05@-21.66,-3.5 -20.5,-4.66 -20.5,-8.903 -21.149,-9.552 -21.277,-9.552 -21.287,-9.562 C_enA.1@-21.287,-9.787 ; v2(-19,-12) -19,-11.079 -19.174,-10.905 U_enA.8@-19.182,-10.905 -19.8,-10.905 -20.918,-9.787 C_enA.1@-21.287,-9.787 ; v2(-14,-12) -14,-11.079 -13.826,-10.905 U_enA.1@-13.818,-10.905 U_enA.2@-13.818,-9.635 -11.515,-9.635 R19.2@-11.5,-9.65 R18.2@-11.5,-8.35 ; C_enA.1@-21.4,-9.9 C_enA.1@-21.287,-9.787
  Bottom Layer w0.254: v2(-19,-12) v2(-14,-12)
V_inB: C_enB.1 J4_B.05 R16.2 R17.2 U_enB.1 U_enB.2 U_enB.8 | length 22.4
  Top Layer w0.254: J4_B.05@11.38,-3.5 12.731,-4.851 12.731,-6.256 12.223,-6.764 12.223,-8.052 C_enB.1@11.875,-8.4 ; C_enB.1@11.5,-8.4 C_enB.1@11.875,-8.4 ; v4(14,-12) 14,-11.079 13.826,-10.905 U_enB.8@13.818,-10.905 13.2,-10.905 12.223,-9.928 12.223,-8.748 C_enB.1@11.875,-8.4 ; v2(19,-12) 19,-11.079 19.174,-10.905 U_enB.1@19.182,-10.905 U_enB.2@19.182,-9.635 21.485,-9.635 R17.2@21.5,-9.65 21.5,-8.673 21.823,-8.35 R16.2@22,-8.35
  Bottom Layer w0.254: v4(14,-12) v2(19,-12)
VDD33: C4.1 C5.1 C6.1 C7.1 C8.1 C9.1 L1.1 P1.1 P4.2 R2.1 R3.1 U?.1 U?.19 U?.32 U?.48 U?.64 | length 221.9
  Top Layer w0.254: v1(-22.867,9.196) -19.774,12.29 -19.774,14.774 -24.5,19.5 -24.5,24 -21,27.5 -21,46 v1(-21,50.5) ; U?.1@-6.579,82.243 -6.159,82.663 U?.64@-6.159,84.537 ; U?.64@-6.579,84.958 U?.64@-6.159,84.537 ; U?.48@1.439,90.261 1.439,90.243 0.5,89.304 0.5,85 1.5,84 ; U?.19@2.146,77.646 1.726,78.067 1.726,78.086 1,78.811 1,81.999 3.001,83.999 ; v1(4.046,83.797) v1@4.046,84 ; U?.32@6.743,82.243 6.743,82.261 5.977,83.027 5.977,83.198 5.378,83.797 4.249,83.797 v1@4.046,84 ; 13.326,73.5 13.342,73.484 ; C6.1@15.527,76.127 16.713,74.941 17.313,74.941 C7.1@17.5,74.754 ; C7.1@17.794,75.021 18.06,74.754 C8.1@19,74.754 C9.1@20.5,74.754 20.752,75.006 20.931,75.006 ; U?.64@-6.159,84.537 -5.621,84 1.5,84 ; 1.5,84 3.001,84 ; 3.001,83.999 3.255,83.999 3.263,83.991 4.037,83.991 v1@4.046,84
  Top Layer w0.5: L1.1@13.193,78.407 13.286,78.407 13.385,78.505 18.995,78.505 P1.1@19,78.5 ; L1.1@13.24,78.36 C6.1@15.473,76.127 ; C5.1@14.084,72.584 14.058,72.61 14.058,73.143 14.5,73.585 14.5,75.154 C6.1@15.473,76.127 ; C6.1@15.5,76.127 C6.1@15.473,76.127
  Top Layer w1: v1(-21,50.5) -21,46 -18.5,43.5 v1(-13,43.5) ; R2.1@10.596,76.096 10.596,76.084 12.584,74.096 C4.1@12.584,74.084 13.247,73.421 C5.1@14.084,72.584 15.659,71.008 16.992,71.008 v1(17,71)
  Bottom Layer w0.254: v1(4.046,83.797) 4.24,83.602 4.24,81.76 5,81 9.5,81 11.5,79 v1(13,79)
  Bottom Layer w1: v1(-21,50.5) -21,68.5 -20.128,69.372 -19.658,69.372 v1(-18.03,71) ; v1(-13,43.5) -12.927,43.5 -12.527,43.9 -2.602,43.9 -1.202,42.5 P4.2@-1.04,42.5 1.96,39.5 19.553,39.5 21.606,41.553 21.606,66.394 v1(17,71)
VDD33_OUT: C18.1 P4.1 U2.2 U2.4 | length 27.7
  Top Layer w1: P4.1@-3.58,42.5 -1,39.92 -1,27.7 -2.302,26.398 -2.302,24.823 -2.4,24.725 -2.4,24 -2.775,23.625 U2.4@-3.5,23.625 U2.2@-3.5,17.375
VDD33ST: P0.01 P4.3 | length 57.2
  Top Layer w1: v1(0,63.5) 0,59.5 v1(1,58.5)
  Bottom Layer w1: v1(0,63.5) 0,87.5 1.565,89.065 3.065,89.065 4.5,90.5 4.5,92.54 P0.01@3.54,93.5 ; v1(1,58.5) 4.5,55 4.5,45.5 P4.3@1.5,42.5
VDDA: C10.1 C22.1 L1.2 U?.13 | length 31
  Top Layer w0.254: U?.13@-2.337,78 -2.318,78 -1.318,79 -1.005,79 0,77.995 0,76 1,75 7,75 9.593,77.593 11.655,77.593 L1.2@11.761,77.487 ; C22.1@22,73.754 22.027,73.754 22.902,72.879 23.248,72.879 C10.1@23.5,72.627
  Bottom Layer w0.254: v1(12.5,77) 13.5,76 20.5,76 v1(22,74.5)
VIN74: C12.1 C15.1 R6.1 SW0.3 U3.1 U3.2 | length 30.2
  Top Layer w1: C12.1@-23.15,5.925 -23.15,6.35 -17.204,12.296 -16.454,12.296 -16.451,12.299 R6.1@-16.451,12.5 ; C15.1@-9,3.9 v1(-9,5.5) -7.033,7.467 -5.65,7.467 -5.514,7.603 U3.2@-4.96,7.603 ; U3.2@-4.475,7.635 U3.1@-4.475,8.905
  Bottom Layer w1: SW0.3@-20,9.5 -17.978,7.478 -10.978,7.478 v1(-9,5.5)
VOUT5: C16.1 C17.1 C19.2 C20.1 C23.1 L3.2 R8.1 R10.1 R11.1 U2.3 U5.12 U6.3 | length 114
  Top Layer w0.2: v5(-16.36,29.5) R11.1@-16.36,32.49
  Top Layer w0.254: R10.1@-23.043,12 -23.029,12.013 -23.029,13.315 v1(-23.016,13.329)
  Top Layer w0.4: U5.12@-8.175,36.175 -7.175,36.175
  Top Layer w0.5: -7.175,36.175 -6.557,36.793 -5.655,36.793 -4.616,35.754 -3.793,35.754 -3.5,35.461 -3.5,34.262 -4.116,33.646 -4.354,33.646 C20.1@-5.038,32.962 ; C20.1@-5.5,33.3 -5.1,32.9 -4.057,31.857 -4.057,31.443 v1(-5,30.5)
  Top Layer w1: v1(-23,20) -23,22.86 -16.925,28.935 -16.855,28.935 -16.36,29.43 v5(-16.36,29.5) ; R11.1@-16.355,32.495 R11.1@-16.35,32.5 ; L3.2@-2.324,2 -2.324,1.674 -1.81,1.16 4.385,1.16 5.224,1.999 5.224,2.715 5.951,3.442 R8.1@5.951,7 5.951,6.799 C16.1@7.175,5.575 ; U2.3@-1.2,17.375 -1.2,17.05 -1.25,17 -1.438,17 -2.024,16.414 C17.1@-2.024,14.5 -2.024,14.324 -0.493,12.793 3.444,12.793 4.976,14.324 7.5,11.8 7.5,5.9 C16.1@7.65,5.75 ; C23.1@4.976,14.5 4.976,16.414 5.562,17 5.75,17 5.8,17.05 U6.3@5.8,17.375 ; C16.1@7.5,5.425 7.975,5.425 C16.1@8,5.4
  Bottom Layer w0.254: v1(-23.016,13.329) -23,13.345 -19.296,13.345 -18.908,13.733 -7.767,13.733 -4,17.5 v1(-1,17.5)
  Bottom Layer w1: v1(-23.016,13.329) -23.008,13.337 -23.008,19.992 v1(-23,20) ; v5(-16.36,29.5) -13.36,32.5 -7,32.5 v1(-5,30.5)
pads on no net: P4.4 SW0.1 U3.9 U4.6 U5.8

## Silkscreen, mask and mechanical layers (free items; w line width, h text height)
Top Overlay:
  lines w0.254: -27.5,14 -17.5,14 -7,14 -7,27.5 -17.5,27.5 ; -27.5,70 27.5,70 ; -23,-9 -10,-9 ; -17.5,0 -17.5,70 ; -17.5,40 17.5,40 ; -16.5,-13.5 -16.5,-12 -16.5,-2 ; 10,-9 23,-9 ; 16.5,-13.5 16.5,-12 16.5,-2 ; 17.479,0.021 17.479,69.846 ; 17.479,14 27.5,14 ; 17.5,14 7,14 7,27.5 17.5,27.5
Mechanical 1:
  lines w0.254: 14.5,-13.5 17.5,-13.5 22,-13.5 23,-12.5 23,-2 22.5,-2 22.5,-1.5 ; 15,-13.5 11,-13.5 10,-12.5 10,-2 11.5,-2 11.5,0 -11.5,0 -11.5,-2 -10,-2 -10,-12.5 -11,-13.5 -11.781,-13.5 -14.125,-13.5 -17,-13.5 -22,-13.5 -23,-12.5 -23,-2 -22.5,-2 -22.5,0 -27.5,5 -27.5,70 -32.5,70 -35,70 -37.5,72.5 cw(c-10.5,74.5) -12.5,101.5 12.5,101.5 cw(c10.5,74.5) 37.5,72.5 35,70 27.5,70 27.5,7.905 27.5,5 22.5,0 22.5,-1.5 ; 22.5,-1.5 22.5,-1.5 ; -21.5,-2 -21.5,0 -12.5,0 -12.5,-2 -21.5,-2 ; 12.5,-2 21.5,-2 21.5,0 12.5,0 12.5,-2